# EAGLE board Scale Car Board PCB 20260625 (EAGLE 9.7.0)
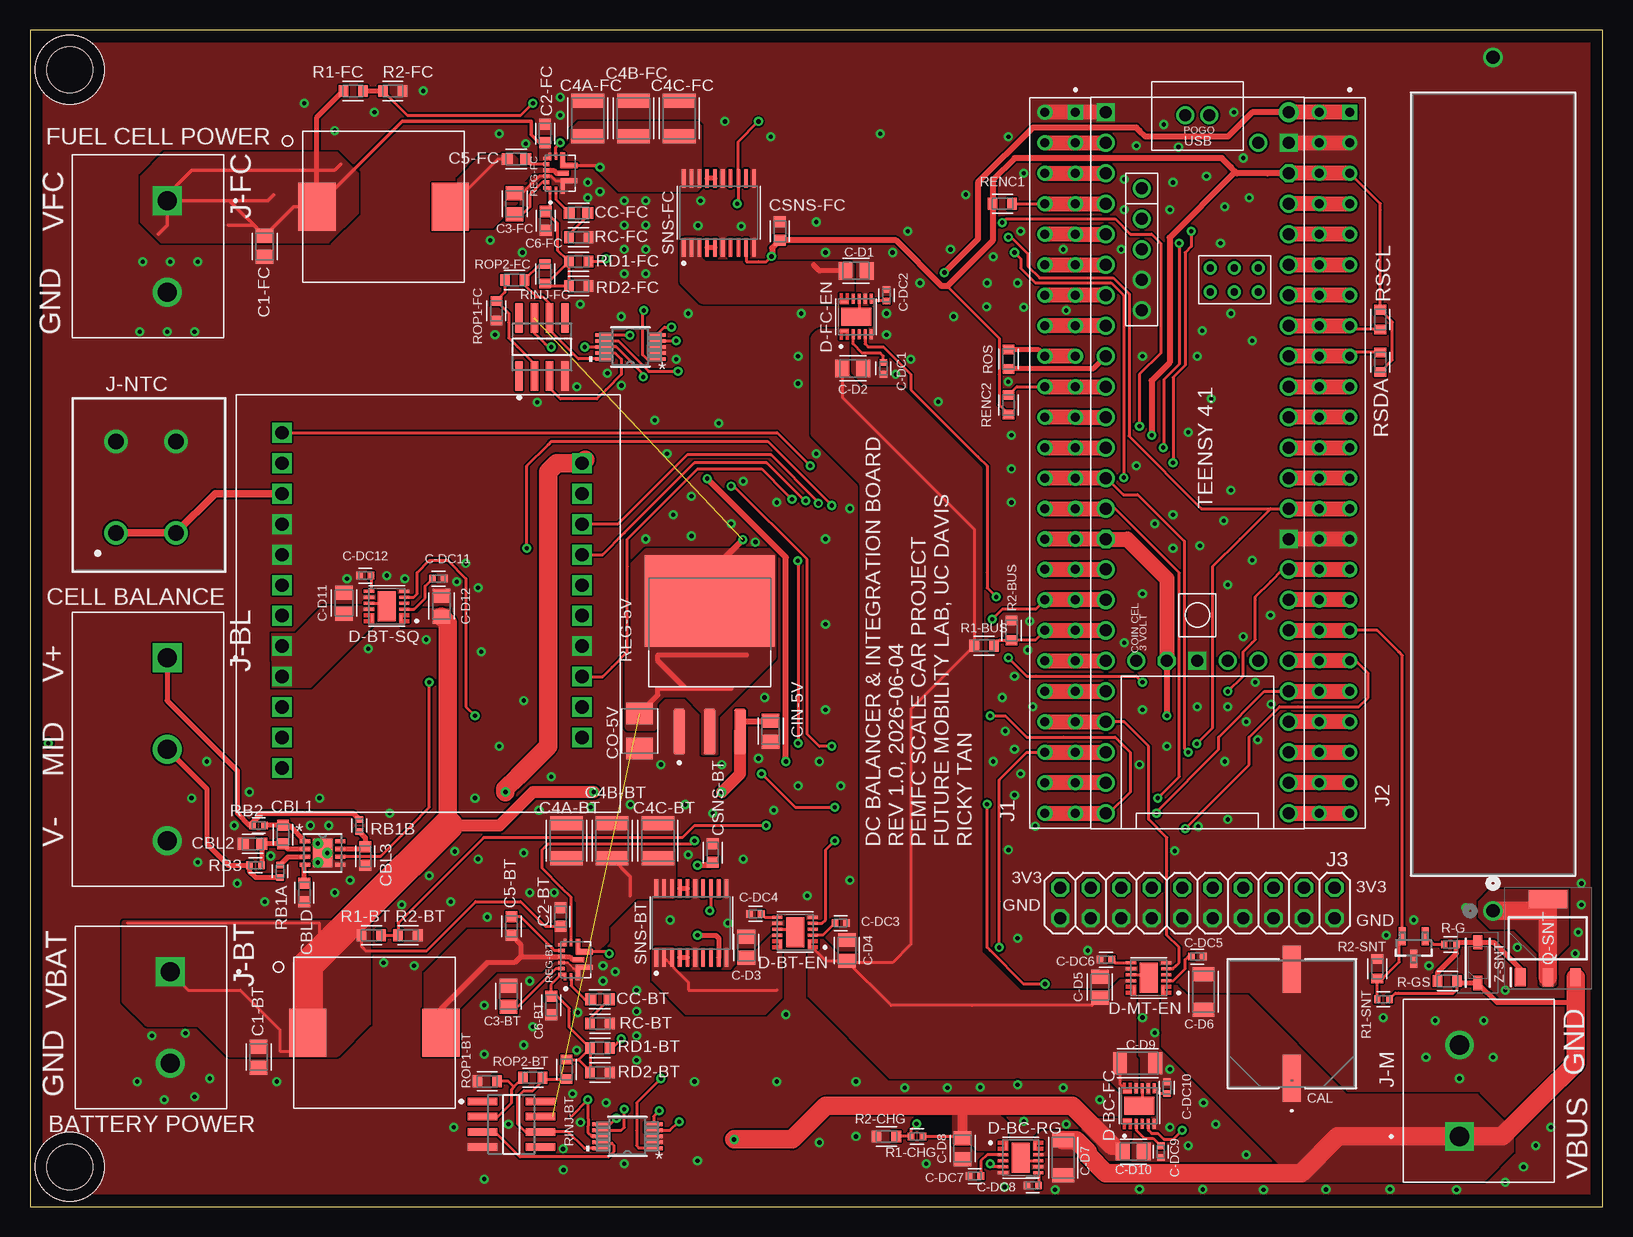
[diagram p0: board, top side]
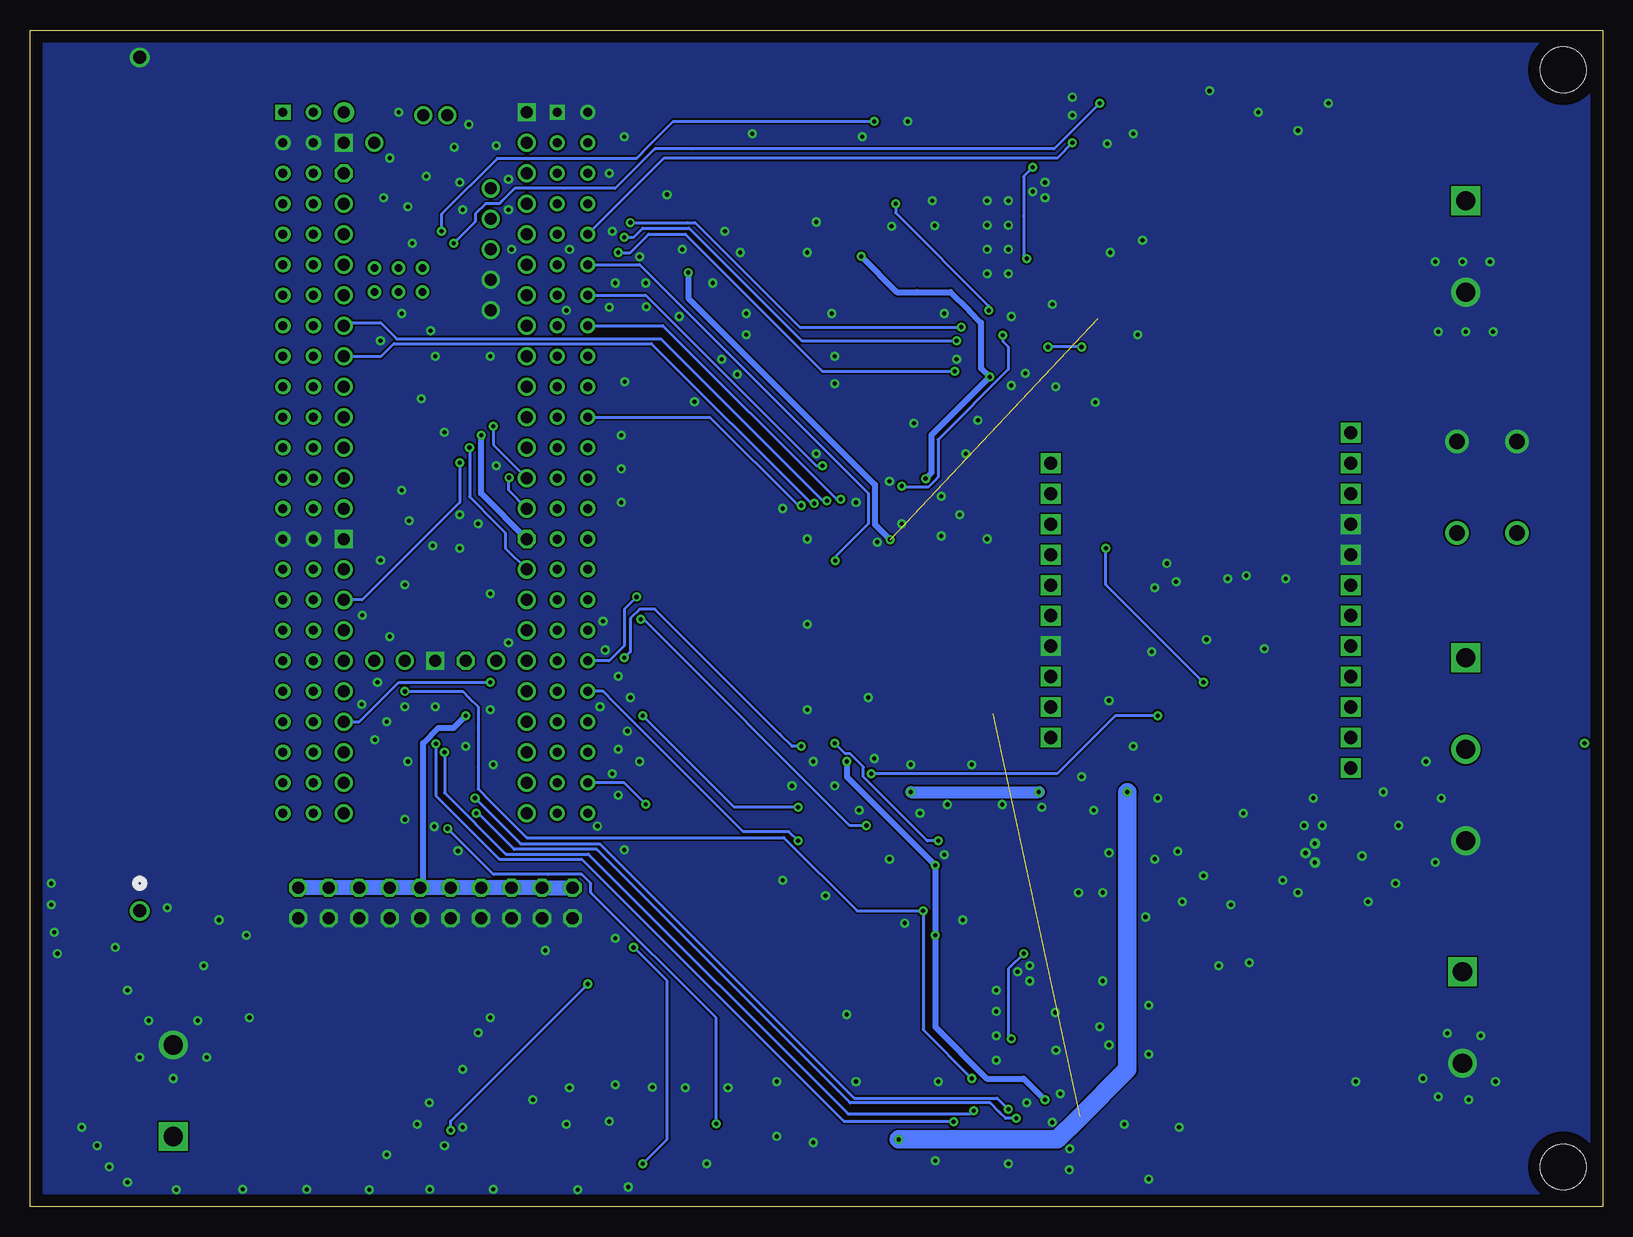
[diagram p1: board, bottom side, seen from below]

Size 131.06 x 98.04 mm. Coordinates in mm from the lower left corner, seen from the top.
Outline: 0,0 131.06,0 131.06,98.04 0,98.04 0,0
Copper layers (1*16): Top 0.035mm / dielectric 1.5mm / Bottom 0.035mm
Design rules "Fusion Electronics Design Rules": minimum track width 6mil, minimum drill 0.35mm, track to track 6mil, track to pad 6mil, pad to pad 6mil, via to via 6mil, smd to smd 6mil, copper to edge 40mil, drill to drill 6mil, minimum pad ring 10mil, minimum via ring 8mil, stop-mask expansion 4mil, vias tented up to drill 9999mil, thermal gap 10mil
Holes 3.8 mm at 3.3,94.74 3.3,3.3

## Footprints (pad centres in the part's own frame; a part is rotated, then mirrored left to right if it is on the bottom)
DRB8_1P6X2P4 = smd 0.85 x 0.35: 1 -1.475,0.975; 2 -1.475,0.325; 3 -1.475,-0.325; 4 -1.475,-0.975; 5 1.475,-0.975; 6 1.475,-0.325; 7 1.475,0.325; 8 1.475,0.975 | smd 1.6 x 2.4: 9 0,0 | drill 0.35 pad 0.508: V -0.394,-0.787; V_2 -0.394,0.787; V_4 0.394,0
CAPC2012X110 = smd 1.165 x 1.465: 1 -0.875,0; 2 0.875,0
CAPC1608X85 = smd 0.921 x 0.97: 1 -0.775,0; 2 0.775,0
CAPC3225X135 = smd 1.165 x 2.715: 1 -1.475,0; 2 1.475,0
CAPC3216X135 = smd 1.165 x 1.815: 1 -1.475,0; 2 1.475,0
CAPC1005X60 = smd 0.56 x 0.629: 1 -0.485,0; 2 0.485,0
CAP_FN_G_PAN = smd 3.912 x 1.499: 1 -4.547,0; 2 4.547,0
AG105 = drill 1.1 square: CSEL 1.5,-7.08; LDIS 26.5,-7.08; MPPTD 26.5,-29.94; MPPTSEL 26.5,-27.4; NC1 1.5,-14.7; NC2 1.5,-17.24; NC3 1.5,-24.86; SCL 1.5,-19.78; SDA 1.5,-22.32; STAT 1.5,-9.62; THERM 26.5,-24.86; VBAT+1 26.5,-12.16; VBAT+2 26.5,-9.62; VBAT-1 26.5,-22.32; VBAT-2 26.5,-19.78; VIN+ 1.5,-27.4; VIN- 1.5,-12.16; VLOAD+1 26.5,-4.54; VLOAD+2 26.5,-2; VLOAD-1 26.5,-17.24; VLOAD-2 26.5,-14.7; VSEL 1.5,-4.54
CAPM3528X210 = smd 1.796 x 2.204: 1 -1.46,0; 2 1.46,0
IC_RT1987N-A = smd 0.2 x 0.7: 1_2 -1.2,1; 11_12 1.2,1 | smd 0.85 x 0.25: 3 -1.475,0.25; 4 -1.475,-0.25; 5 -1.475,-0.75; 6 -1.475,-1.25; 7 1.475,-1.25; 8 1.475,-0.75; 9 1.475,-0.25; 10 1.475,0.25 | smd 1.5 x 2.5: 13 0,0
AMPHENOL_87606-324LF = drill 0.75 pad 1.258 square: 01 29.21,-1.27 | drill 0.75 pad 1.258: 02 29.21,1.27; 03 26.67,-1.27; 04 26.67,1.27; 05 24.13,-1.27; 06 24.13,1.27; 07 21.59,-1.27; 08 21.59,1.27; 09 19.05,-1.27; 10 19.05,1.27; 11 16.51,-1.27; 12 16.51,1.27; 13 13.97,-1.27; 14 13.97,1.27; 15 11.43,-1.27; 16 11.43,1.27; 17 8.89,-1.27; 18 8.89,1.27; 19 6.35,-1.27; 20 6.35,1.27; 21 3.81,-1.27; 22 3.81,1.27; 23 1.27,-1.27; 24 1.27,1.27; 25 -1.27,-1.27; 26 -1.27,1.27; 27 -3.81,-1.27; 28 -3.81,1.27; 29 -6.35,-1.27; 30 -6.35,1.27; 31 -8.89,-1.27; 32 -8.89,1.27; 33 -11.43,-1.27; 34 -11.43,1.27; 35 -13.97,-1.27; 36 -13.97,1.27; 37 -16.51,-1.27; 38 -16.51,1.27; 39 -19.05,-1.27; 40 -19.05,1.27; 41 -21.59,-1.27; 42 -21.59,1.27; 43 -24.13,-1.27; 44 -24.13,1.27; 45 -26.67,-1.27; 46 -26.67,1.27; 47 -29.21,-1.27; 48 -29.21,1.27
2X10 = drill 1.016 octagon: 1 -11.43,-1.27; 2 -11.43,1.27; 3 -8.89,-1.27; 4 -8.89,1.27; 5 -6.35,-1.27; 6 -6.35,1.27; 7 -3.81,-1.27; 8 -3.81,1.27; 9 -1.27,-1.27; 10 -1.27,1.27; 11 1.27,-1.27; 12 1.27,1.27; 13 3.81,-1.27; 14 3.81,1.27; 15 6.35,-1.27; 16 6.35,1.27; 17 8.89,-1.27; 18 8.89,1.27; 19 11.43,-1.27; 20 11.43,1.27
CUI_TB005_-762-03BE = drill 1.6 square: 1 0,0 | drill 1.6: 2 7.62,0; 3 15.24,0
CUI_TB005-762-02BE = drill 1.6 square: 1 0,0 | drill 1.6: 2 7.62,0
691411410002 = drill 1.3: 1 -3.81,2.5; 2 3.81,2.5; A1 -3.81,-2.5; A2 3.81,-2.5
HCM1A1305V3-2R2-R = smd 3.1 x 4: P$1 -5.55,0; P$2 5.55,0
RM_10_ADI = smd 1.511 x 0.33: 1 -2.175,1; 2 -2.175,0.5; 3 -2.175,0; 4 -2.175,-0.5; 5 -2.175,-1; 6 2.175,-1; 7 2.175,-0.5; 8 2.175,0; 9 2.175,0.5; 10 2.175,1
D0008A-IPC_A = smd 2.469 x 0.622: 1 -2.414,1.905; 2 -2.414,0.635; 3 -2.414,-0.635; 4 -2.414,-1.905; 5 2.414,-1.905; 6 2.414,-0.635; 7 2.414,0.635; 8 2.414,1.905
SOT230P700X170-4N = smd 1.5 x 0.9: 1 -3.25,2.3; 2 -3.25,0; 3 -3.25,-2.3 | smd 1.5 x 3.2: 4 3.25,0
RESC1608X60 = smd 0.799 x 0.974: 1 -0.815,0; 2 0.815,0
RESC1005X40 = smd 0.535 x 0.644: 1 -0.507,0; 2 0.507,0
RES_SQP20A_YAG = drill 1.092 pad 1.6: 1 0,0; 2 71.12,0
TO254P1524X483-4N = smd 3.79 x 0.99: 1 -6.4,2.54; 2 -6.4,0; 3 -6.4,-2.54 | smd 7.62 x 10.84: 4 4.48,0
CONV_TPS61288LRQQR = smd 0.235 x 0.71: 1 -1.238,1.1; 7 1.238,1.1 | smd 0.55 x 0.25: 2 -1.425,0.375; 6 1.425,0.375 | smd 1.26 x 0.4: 3 -1.072,-0.198; 5 1.075,-0.2 | smd 0.4 x 1: 4 0,-0.25 | smd 0.25 x 0.55: 8 0.75,1.175; 9 0.25,1.175; 10 -0.25,1.175; 11 -0.75,1.175 | smd 0.4 x 1.26: 12 -0.642,-0.828; 13 0.648,-0.828 | smd 0.55 x 0.26: 14 -1.427,0.875; 15 1.427,0.875
SOP65P640X120-20N = smd 1.57 x 0.41: 1 -2.87,2.925; 2 -2.87,2.275; 3 -2.87,1.625; 4 -2.87,0.975; 5 -2.87,0.325; 6 -2.87,-0.325; 7 -2.87,-0.975; 8 -2.87,-1.625; 9 -2.87,-2.275; 10 -2.87,-2.925; 11 2.87,-2.925; 12 2.87,-2.275; 13 2.87,-1.625; 14 2.87,-0.975; 15 2.87,-0.325; 16 2.87,0.325; 17 2.87,0.975; 18 2.87,1.625; 19 2.87,2.275; 20 2.87,2.925
TEENSY41 = drill 1: 0-RX1/CS1/CRX2 -27.94,-7.62; 1-TX1/MISO1/CTX2 -25.4,-7.62; 2-OUT2 -22.86,-7.62; 3-LRCLK2 -20.32,-7.62; 4-BCLK2 -17.78,-7.62; 5-IN2 -15.24,-7.62; 6-OUT1D -12.7,-7.62; 7-RX2/OUT1A -10.16,-7.62; 8-TX2/IN1 -7.62,-7.62; 9-OUT1C -5.08,-7.62; 10-CS\MQSR -2.54,-7.62; 11-MOSI/CTX1 0,-7.62; 12-MISO/MQSL 2.54,-7.62; 13-SCK/LED 2.54,7.62; 14-A0/TX3/SPDIF_OUT 0,7.62; 15-A1/RX3/SPDIF_IN -2.54,7.62; 16-A2/RX4/SCL1 -5.08,7.62; 17-A3/TX4/SDA1 -7.62,7.62; 18-A4/SDA0 -10.16,7.62; 19-A5/SCL0 -12.7,7.62; 20-A6/TX5/LRCLK1 -15.24,7.62; 21-A7/RX5/BCLK1 -17.78,7.62; 22-A8/CTX1 -20.32,7.62; 23-A9/CRX1/MCLK1 -22.86,7.62; 24-A10/TX6/SCL2 7.62,-7.62; 25-A11/RX6/SDA2 10.16,-7.62; 26-A12/MOSI1 12.7,-7.62; 27-A13/SCK1 15.24,-7.62; 28-RX7 17.78,-7.62; 29-TX7 20.32,-7.62; 30-CRX3 22.86,-7.62; 31-CTX3 25.4,-7.62; 32-OUT1B 27.94,-7.62; 33-MCLK2 27.94,7.62; 34-RX8 25.4,7.62; 35-TX8 22.86,7.62; 36-PWM 20.32,7.62; 37-PWM 17.78,7.62; 38-A14/CS/IN1 15.24,7.62; 39-A15/CS/OUT1A 12.7,7.62; 40-A16/CS1 10.16,7.62; 41-A17/MISO1 7.62,7.62; +5V -24.13,-4.62; D+ -30.25,-1; D- -30.25,1; DM -21.59,-4.62; DP -19.05,-4.62; GND4 -16.51,-4.62; GND5 -13.97,-4.62; ON/OFF 15.24,5.08; PROGRAM 15.24,2.54; VBAT 15.24,-5.08; VUSB -27.94,5.08 | drill 1 octagon: 3V3-1 5.08,-7.62; 3V3-2 15.24,-2.54; 3V3-3 -25.4,7.62 | drill 0.6: G -15.51,3.08; LED -17.51,3.08; R+ -17.51,5.08; R- -15.51,5.08; T+ -15.51,1.08; T- -17.51,1.08 | drill 1 square: GND1 -30.48,-7.62; GND2 15.24,0; GND3 5.08,7.62; GND6 -27.94,7.62 | drill 1 pad 1.676: VIN -30.48,7.62
DBZ0003A_N = smd 1.5 x 0.6: 1 -0.95,0.95; 2 -0.95,-0.95; 3 0.95,0
SOD3716X145N = smd 1.2 x 0.75: 1 -1.7,0; 2 1.7,0

## Placement (x,y rotation side)
BAL  BQ29200DRBTDRB8_1P6X2P4  [DRB8_1P6X2P4]  24.38,29.46 0 top
C1-BT  10uF  [CAPC2012X110]  19.05,12.45 270 top
C1-FC  10uF  [CAPC2012X110]  19.56,80.01 270 top
C2-BT  100nF  [CAPC1608X85]  44.2,24.13 90 top
C2-FC  100nF  [CAPC1608X85]  42.93,89.41 90 top
C3-BT  2.2uF  [CAPC2012X110]  39.88,17.53 90 top
C3-FC  2.2uF  [CAPC2012X110]  40.39,83.57 90 top
C4A-BT  22uF  [CAPC3225X135]  44.7,30.48 90 top
C4A-FC  22uF  [CAPC3225X135]  46.48,90.68 90 top
C4B-BT  22uF  [CAPC3225X135]  48.51,30.48 90 top
C4B-FC  22uF  [CAPC3225X135]  50.29,90.68 90 top
C4C-BT  22uF  [CAPC3225X135]  52.32,30.48 90 top
C4C-FC  22uF  [CAPC3225X135]  54.1,90.68 90 top
C5-BT  100nF  [CAPC1608X85]  40.13,23.37 90 top
C5-FC  100nF  [CAPC1608X85]  40.54,87.3 0 top
C6-BT  27pF  [CAPC1608X85]  43.43,16.76 90 top
C6-FC  27pF  [CAPC1608X85]  42.98,82.14 90 top
C-D1  10uF  [CAPC2012X110]  68.83,77.98 0 top
C-D2  10uF  [CAPC2012X110]  68.58,69.85 0 top
C-D3  10uF  [CAPC2012X110]  59.69,21.59 90 top
C-D4  10uF  [CAPC2012X110]  68.07,21.34 90 top
C-D5  10uF  [CAPC2012X110]  89.15,18.29 90 top
C-D6  10uF  [CAPC3216X135]  97.79,17.89 90 top
C-D7  10uF  [CAPC3216X135]  86.11,4.06 270 top
C-D8  10uF  [CAPC2012X110]  77.72,4.83 270 top
C-D9  10uF  [CAPC3216X135]  92.31,11.94 0 top
C-D10  10uF  [CAPC2012X110]  91.95,4.57 0 top
C-D11  10uF  [CAPC2012X110]  26.16,50.29 90 top
C-D12  10uF  [CAPC2012X110]  34.29,50.04 90 top
C-DC1  1nF  [CAPC1005X60]  71.12,69.85 90 top
C-DC2  5.6nF  [CAPC1005X60]  71.37,75.95 270 top
C-DC3  1nF  [CAPC1005X60]  67.56,23.62 180 top
C-DC4  5.6nF  [CAPC1005X60]  60.45,24.38 0 top
C-DC5  1nF  [CAPC1005X60]  97.28,20.83 180 top
C-DC6  5.6nF  [CAPC1005X60]  89.66,20.57 0 top
C-DC7  1nF  [CAPC1005X60]  78.74,2.54 0 top
C-DC8  5.6nF  [CAPC1005X60]  83.57,1.76 0 top
C-DC9  1nF  [CAPC1005X60]  94.23,4.57 90 top
C-DC10  5.6nF  [CAPC1005X60]  94.74,9.91 270 top
C-DC11  1nF  [CAPC1005X60]  34.04,52.32 180 top
C-DC12  5.6nF  [CAPC1005X60]  27.94,52.58 0 top
CAL  470uF EEE-FN1V471UPCAP_FN_G_PAN  [CAP_FN_G_PAN]  105.16,15.24 90 top
CBL1  100nF  [CAPC1608X85]  21.08,30.99 90 top
CBL2  100nF  [CAPC1608X85]  18.54,30.23 180 top
CBL3  100nF  [CAPC1608X85]  27.94,29.21 270 top
CBLD  330nF  [CAPC1608X85]  22.86,26.16 270 top
CC-BT  2nF  [CAPC1608X85]  47.5,17.27 180 top
CC-FC  2nF  [CAPC1608X85]  45.72,82.8 180 top
CHG  AG105  [AG105]  47.5,34.54 180 top
CIN-5V  10uF  [CAPC2012X110]  61.72,39.62 270 top
CO-5V  10uF TANT  [CAPM3528X210]  50.8,39.62 270 top
CSNS-BT  100nF  [CAPC1608X85]  56.9,29.46 270 top
CSNS-FC  100nF  [CAPC1608X85]  62.48,81.28 270 top
D-BC-FC  RT1987N-A  [IC_RT1987N-A]  92.46,8.38 90 top
D-BC-RG  RT1987N-A  [IC_RT1987N-A]  82.55,4.06 0 top
D-BT-EN  RT1987N-A  [IC_RT1987N-A]  63.75,22.86 180 top
D-BT-SQ  RT1987N-A  [IC_RT1987N-A]  29.72,50.04 180 top
D-FC-EN  RT1987N-A  [IC_RT1987N-A]  68.83,74.17 90 top
D-MT-EN  RT1987N-A  [IC_RT1987N-A]  93.22,19.05 180 top
J1  87606-324LF  [AMPHENOL_87606-324LF]  85.85,61.98 90 top
J2  87606-324LF  [AMPHENOL_87606-324LF]  108.71,61.98 90 top
J3  PINHD-2X10  [2X10]  97.28,25.29 0 top
J-BL  TB005_762_03BE  [CUI_TB005_-762-03BE]  11.43,45.72 270 top
J-BT  TB005-762-02BE  [CUI_TB005-762-02BE]  11.68,19.56 270 top
J-FC  TB005-762-02BE  [CUI_TB005-762-02BE]  11.43,83.82 270 top
J-M  TB005-762-02BE  [CUI_TB005-762-02BE]  119.13,5.84 90 top
J-NTC  691411410002  [691411410002]  9.65,59.94 90 top
L-BT  2.2uH  [HCM1A1305V3-2R2-R]  28.7,14.48 0 top
L-FC  2.2uH  [HCM1A1305V3-2R2-R]  29.46,83.31 0 top
MDAC-BT  AD5443YRMZ-REEL7RM_10_ADI  [RM_10_ADI]  49.78,5.84 180 top
MDAC-FC  AD5443YRMZ-REEL7RM_10_ADI  [RM_10_ADI]  50.04,71.63 180 top
OP-BT  OPA197IDD0008A-IPC_A  [D0008A-IPC_A]  40.13,6.86 0 top
OP-FC  OPA197IDD0008A-IPC_A  [D0008A-IPC_A]  42.67,71.63 90 top
Q-SNT  BSP170PH6327XTSA1  [SOT230P700X170-4N]  126.49,22.35 90 top
R1-BT  16.2kOhm  [RESC1608X60]  28.45,22.61 180 top
R1-BUS  46.4kOhm  [RESC1608X60]  79.5,46.74 180 top
R1-CHG  78.7kOhm  [RESC1005X40]  73.91,5.84 0 top
R1-FC  27.4kOhm  [RESC1608X60]  26.92,92.96 180 top
R1-SNT  78.7kOhm  [RESC1005X40]  112.78,17.27 0 top
R2-BT  10kOhm  [RESC1608X60]  31.5,22.61 180 top
R2-BUS  10kOhm  [RESC1608X60]  81.79,48.01 270 top
R2-CHG  10kOhm  [RESC1608X60]  71.37,5.84 0 top
R2-FC  10kOhm  [RESC1608X60]  30.23,92.96 180 top
R2-SNT  10kOhm  [RESC1608X60]  112.27,19.81 270 top
R-G  220 Ohm  [RESC1005X40]  118.36,21.84 180 top
R-GS  3.3kOhm  [RESC1608X60]  118.11,18.8 0 top
R-SHUNT  SQP20AJB-47RRES_SQP20A_YAG  [RES_SQP20A_YAG]  121.92,24.64 90 top
RB1A  100Ohm  [RESC1005X40]  20.83,27.94 90 top
RB1B  100Ohm  [RESC1005X40]  27.43,31.75 270 top
RB2  160Ohm  [RESC1005X40]  19.05,31.75 180 top
RB3  260Ohm  [RESC1005X40]  18.8,28.45 0 top
RC-BT  27.4kOhm  [RESC1608X60]  47.5,15.24 180 top
RC-FC  61.2kOhm  [RESC1608X60]  45.72,80.77 180 top
RD1-BT  237kOhm  [RESC1608X60]  47.5,13.21 0 top
RD1-FC  237kOhm  [RESC1608X60]  45.72,78.74 0 top
RD2-BT  10kOhm  [RESC1608X60]  47.5,11.18 180 top
RD2-FC  10kOhm  [RESC1608X60]  45.72,76.71 180 top
REG-5V  LM1084ISX-5.0/NOPB  [TO254P1524X483-4N]  56.64,45.97 90 top
REG-BT  TPS61288LRQQR  [CONV_TPS61288LRQQR]  45.47,20.57 90 top
REG-FC  TPS61288LRQQR  [CONV_TPS61288LRQQR]  44.2,86.11 90 top
RENC1  4.7kOhm  [RESC1608X60]  81.03,83.57 0 top
RENC2  4.7kOhm  [RESC1608X60]  81.53,66.8 90 top
RINJ-BT  53.6kOhm  [RESC1608X60]  44.7,11.43 90 top
RINJ-FC  53.6kOhm  [RESC1608X60]  42.93,77.72 270 top
ROP1-BT  10kOhm  [RESC1608X60]  38.1,10.44 180 top
ROP1-FC  10kOhm  [RESC1608X60]  38.86,74.65 270 top
ROP2-BT  40.2kOhm  [RESC1608X60]  41.91,10.73 0 top
ROP2-FC  40.2kOhm  [RESC1608X60]  40.39,77.22 0 top
ROS  100Ohm  [RESC1608X60]  81.53,70.61 270 top
RSCL  10kOhm  [RESC1608X60]  112.52,73.91 90 top
RSDA  10kOhm  [RESC1608X60]  112.52,70.36 270 top
SNS-BT  INA253A1IPWR  [SOP65P640X120-20N]  55.12,23.62 90 top
SNS-FC  INA253A1IPWR  [SOP65P640X120-20N]  57.4,82.8 90 top
U$1  TEENSY41  [TEENSY41]  97.28,60.71 270 top
U-SNT  TL431BIDBZRDBZ0003A_N  [DBZ0003A_N]  115.32,21.59 270 top
Z-SNT  BZT52C12-13-F  [SOD3716X145N]  120.65,20.32 90 top

## Library data of the parts
BAL = BQ29200DRBT; COPYRIGHT: Copyright (C) 2026 Ultra Librarian. All rights reserved.; DATASHEET: https://www.ti.com/lit/gpn/bq29200; DESCRIPTION: Voltage Protection with Automatic Cell Balance For 2-Cell Li-Ion Batteries, OVP=4.35V 8-SON -40 to 85; MANUFACTURER_NAME: Texas Instruments; MANUFACTURER_PART_NUMBER: BQ29200DRBT
C1-BT C1-FC C2-BT C2-FC C3-BT C3-FC C4A-BT C4A-FC C4B-BT C4B-FC C4C-BT C4C-FC C5-BT C5-FC C6-BT C6-FC C-D1-C-D12 C-DC1-C-DC12 CBL1-CBL3 CBLD CC-BT CC-FC CIN-5V CO-5V CSNS-BT CSNS-FC = Tutorial - Fusion 360; CATEGORY: Capacitor
CAL = EEE_FN1V471UP; COPYRIGHT: Copyright (C) 2026 Ultra Librarian. All rights reserved.; MANUFACTURER_NAME: Panasonic; MANUFACTURER_PART_NUMBER: EEE-FN1V471UP
CHG = Silvertel Ag105
D-BC-FC D-BC-RG D-BT-EN D-BT-SQ D-FC-EN D-MT-EN = RT1987N-A; AVAILABILITY: In Stock; CHECK_PRICES: https://www.snapeda.com/parts/RT1987N-A/Richtek/view-part/?ref=eda; DESCRIPTION: OR Controller N+1 ORing Controller N-Channel 1:1 12-VDFN Type V (3x3); MF: Richtek USA Inc.; MP: RT1987N-A; PACKAGE: None; PRICE: None; SNAPEDA_LINK: https://www.snapeda.com/parts/RT1987N-A/Richtek/view-part/?ref=snap
J1 J2 = 87606-324LF; MANUFACTURER: Amphenol ICC (FCI); PARTREV: S; STANDARD: Manufacturer Recommendations
J3 = Connector; CATEGORY: Headers; DESCRIPTION: Header, Straight, 2x10 Position; MANUFACTURER: Generic; MPN: Generic; OPERATING_TEMPERATURE: Generic; PART_STATUS: Active; PITCH: 0.100" (2.54mm); ROHS_COMPLIANCE: Generic; SERIES: Generic; SUB-CATEGORY: Headers, Male Pins; TYPE: Board to Board or Cable, Unshrouded, Through Hole, Straight
J-BL = TB005 -762-03BE
J-BT J-FC J-M = TB005-762-02BE; MANUFACTURER: CUI; STANDARD: Manufacturer Recommendations
J-NTC = Wurth 691411410002
L-BT L-FC = HCM1A1305V3-2R2-R
MDAC-BT MDAC-FC = AD5443YRMZ_REEL7; COPYRIGHT: Copyright (C) 2026 Ultra Librarian. All rights reserved.; DATASHEET: https://www.analog.com/media/en/technical-documentation/data-sheets/AD5426_5432_5443.pdf; DESCRIPTION: 12-Bit High Bandwidth Multiplying DAC's with Serial Interface; MANUFACTURER_NAME: Analog Devices Inc; MANUFACTURER_PART_NUMBER: AD5443YRMZ-REEL7
OP-BT OP-FC = OPA197; COPYRIGHT: Copyright (C) 2026 Ultra Librarian. All rights reserved.; DATASHEET: https://www.ti.com/lit/gpn/opa197; DESCRIPTION: Single, 36-V, precision, rail-to-rail input output, low offset voltage op amp 8-SOIC -40 to 125; MANUFACTURER_NAME: Texas Instruments; MANUFACTURER_PART_NUMBER: OPA197ID; REFDES: RefDes; TYPE: TYPE
Q-SNT = BSP170PH6327XTSA1; DESCRIPTION: MOSFET P-Ch -60V -1.9A SOT-223-3; HEIGHT: 1.7mm; MANUFACTURER_NAME: Infineon; MANUFACTURER_PART_NUMBER: BSP170PH6327XTSA1; MOUSER_PART_NUMBER: 726-BSP170PH6327XTSA; MOUSER_PRICE-STOCK: https://www.mouser.co.uk/ProductDetail/Infineon-Technologies/BSP170PH6327XTSA1?qs=LqwxS8kK3AuKjNiJohPfXg%3D%3D
R1-BT R1-BUS R1-CHG R1-FC R1-SNT R2-BT R2-BUS R2-CHG R2-FC R2-SNT R-G R-GS RB1A RB1B RB2 RB3 RC-BT RC-FC RD1-BT RD1-FC RD2-BT RD2-FC RENC1 RENC2 RINJ-BT RINJ-FC ROP1-BT ROP1-FC ROP2-BT ROP2-FC ROS RSCL RSDA = Resistor; CATEGORY: Resistor; SUB-CATEGORY: Fixed
R-SHUNT = SQP20AJB_47R; COPYRIGHT: Copyright (C) 2026 Ultra Librarian. All rights reserved.; MANUFACTURER_NAME: Yageo; MANUFACTURER_PART_NUMBER: SQP20AJB-47R
REG-5V = LM1084ISX-5
REG-BT REG-FC = TPS61288LRQQR; MANUFACTURER: Texas Instruments; MAXIMUM_PACKAGE_HEIGHT: 1 mm; PARTREV: C; SNAPEDA_PACKAGE_ID: 121210; STANDARD: Manufacturer Recommendations
SNS-BT SNS-FC = INA253A1IPWR
U$1 = TEENSY
U-SNT = TL431BIDBZR; COPYRIGHT: Copyright (C) 2026 Ultra Librarian. All rights reserved.; DATASHEET: https://www.ti.com/lit/gpn/tl431; DESCRIPTION: Adjustable precision shunt regulator 3-SOT-23 -40 to 85; MANUFACTURER_NAME: Texas Instruments; MANUFACTURER_PART_NUMBER: TL431BIDBZR; REFDES: RefDes; TYPE: TYPE
Z-SNT = BZT52C12-13-F; DESCRIPTION: Diodes Inc BZT52C12-13-F Zener Diode, 12V 5% 500 mW SMT 2-Pin SOD-123; HEIGHT: 1.45mm; MANUFACTURER_NAME: Diodes Incorporated; MANUFACTURER_PART_NUMBER: BZT52C12-13-F; MOUSER_PART_NUMBER: 621-BZT52C12-13-F; MOUSER_PRICE-STOCK: https://www.mouser.co.uk/ProductDetail/Diodes-Incorporated/BZT52C12-13-F?qs=HTVp8UxD9pVKIHiLPWVR%2FQ%3D%3D

## Nets
3V3: CSNS-BT.2 CSNS-FC.2 J1.29 J1.30 J2.05 J2.06 J3.2 J3.4 J3.6 J3.8 J3.10 J3.12 J3.14 J3.16 J3.18 J3.20 MDAC-BT.8 MDAC-FC.8 RENC1.1 RENC2.1 RSCL.2 RSDA.2 SNS-BT.9 SNS-FC.9 U$1.3V3-1 U$1.3V3-2 U$1.3V3-3
5V: CO-5V.1 J2.01 J2.02 OP-BT.7 OP-FC.7 REG-5V.2 REG-5V.4 U$1.VIN
BAL-NOK: BAL.8
BT-CURR: J2.31 J2.32 MDAC-BT.1 SNS-BT.13 U$1.41-A17/MISO1
BT-V: J1.33 J1.34 R1-BT.1 R2-BT.2 U$1.25-A11/RX6/SDA2
BUS-V: J1.35 J1.36 R1-BUS.1 R2-BUS.2 U$1.26-A12/MOSI1
CB-DISABLE: BAL.6 J1.21 J1.22 U$1.9-OUT1C
CHG-V: J2.37 J2.38 R1-CHG.1 R2-CHG.2 U$1.38-A14/CS/IN1
CHRG-STAT: CHG.STAT J1.15 J1.16 U$1.6-OUT1D
CS-MDAC-BT: J2.39 J2.40 MDAC-BT.6 U$1.37-PWM
CS-MDAC-FC: J2.41 J2.42 MDAC-FC.6 U$1.36-PWM
D-BC-FC: D-BC-FC.5 J1.45 J1.46 U$1.31-CTX3
D-BC-RG: D-BC-RG.5 J1.43 J1.44 U$1.30-CRX3
D-BT-EN: D-BT-EN.5 J1.39 J1.40 U$1.28-RX7
D-BT-SQ: D-BT-SQ.5 J1.47 J1.48 U$1.32-OUT1B
D-FC-EN: D-FC-EN.5 J1.37 J1.38 U$1.27-A13/SCK1
D-MT-EN: D-MT-EN.5 J1.41 J1.42 U$1.29-TX7
EN-REG-BT: J1.11 J1.12 REG-BT.6 U$1.4-BCLK2
EN-REG-FC: J1.09 J1.10 REG-FC.6 U$1.3-LRCLK2
ENC-EN: J1.17 J1.18 ROS.1
ENC_A: J1.07 J1.08 RENC1.2 U$1.2-OUT2
ENC_B: J1.19 J1.20 RENC2.2 U$1.8-TX2/IN1
FC-CURR: J2.33 J2.34 MDAC-FC.1 SNS-FC.13 U$1.40-A16/CS1
FC-V: J1.31 J1.32 R1-FC.1 R2-FC.2 U$1.24-A10/TX6/SCL2
GND: BAL.5 BAL.9 BAL.V BAL.V_2 BAL.V_4 C1-BT.2 C1-FC.2 C2-BT.2 C2-FC.2 C3-BT.2 C3-FC.2 C4A-BT.2 C4A-FC.2 C4B-BT.2 C4B-FC.2 C4C-BT.2 C4C-FC.2 C6-BT.1 C6-FC.1 C-D1.2 C-D2.2 C-D3.2 C-D4.2 C-D5.2 C-D6.2 C-D7.2 C-D8.2 C-D9.2 C-D10.2 C-D11.2 C-D12.2 C-DC1.1 C-DC2.1 C-DC3.1 C-DC4.1 C-DC5.1 C-DC6.1 C-DC7.1 C-DC8.1 C-DC9.1 C-DC10.1 C-DC11.1 C-DC12.1 CAL.2 CBL2.2 CBL3.2 CBLD.2 CHG.VBAT-1 CHG.VBAT-2 CHG.VIN- CIN-5V.2 CO-5V.2 CSNS-BT.1 CSNS-FC.1 D-BC-FC.6 D-BC-FC.8 D-BC-RG.6 D-BC-RG.8 D-BT-EN.6 D-BT-EN.8 D-BT-SQ.6 D-BT-SQ.8 D-FC-EN.6 D-FC-EN.8 D-MT-EN.6 D-MT-EN.8 J1.01 J1.02 J2.03 J2.04 J2.29 J2.30 J3.1 J3.3 J3.5 J3.7 J3.9 J3.11 J3.13 J3.15 J3.17 J3.19 J-BL.3 J-BT.2 J-FC.2 J-M.2 J-NTC.2 J-NTC.A2 MDAC-BT.2 MDAC-BT.3 MDAC-FC.2 MDAC-FC.3 OP-BT.4 OP-FC.4 R2-BT.1 R2-BUS.1 R2-CHG.1 R2-FC.1 R2-SNT.1 R-SHUNT.2 RC-BT.1 RC-FC.1 RD2-BT.1 RD2-FC.1 REG-5V.1 REG-BT.3 REG-BT.10 REG-BT.12 REG-FC.3 REG-FC.10 REG-FC.12 ROP1-BT.2 ROP1-FC.2 SNS-BT.6 SNS-BT.10 SNS-BT.11 SNS-BT.15 SNS-FC.6 SNS-FC.10 SNS-FC.11 SNS-FC.15 U$1.GND1 U$1.GND2 U$1.GND3 U$1.GND4 U$1.GND5 U$1.GND6 U-SNT.3
MISO: J1.27 J1.28 MDAC-BT.7 MDAC-FC.7 U$1.12-MISO/MQSL
MOSI: J1.25 J1.26 MDAC-BT.5 MDAC-FC.5 U$1.11-MOSI/CTX1
MPPT-DISABLE: CHG.MPPTD J1.13 J1.14 U$1.5-IN2
N$1: SNS-FC.16 SNS-FC.17
N$2: CC-FC.1 RC-FC.2
N$3: C3-FC.1 REG-FC.11
N$4: C5-FC.2 REG-FC.8
N$5: SNS-FC.4 SNS-FC.5
N$6: C-DC1.2 D-FC-EN.3
N$7: MDAC-FC.9 OP-FC.3
N$8: OP-FC.2 ROP1-FC.1 ROP2-FC.1
N$9: C3-BT.1 REG-BT.11
N$10: C5-BT.2 REG-BT.8
N$11: CC-BT.1 RC-BT.2
N$12: SNS-BT.16 SNS-BT.17
N$13: SNS-BT.4 SNS-BT.5
N$14: C-DC3.2 D-BT-EN.3
N$15: MDAC-BT.9 OP-BT.3
N$16: OP-BT.2 ROP1-BT.1 ROP2-BT.1
N$17: D-FC-EN.9 D-FC-EN.13
N$18: C-DC2.2 D-FC-EN.7
N$19: D-BT-EN.9 D-BT-EN.13
N$20: C-DC4.2 D-BT-EN.7
N$21: ROS.2 U$1.7-RX2/OUT1A
N$22: C-DC5.2 D-MT-EN.3
N$23: C-DC7.2 D-BC-RG.3
N$24: D-MT-EN.9 D-MT-EN.13
N$25: C-DC6.2 D-MT-EN.7
N$26: D-BC-RG.9 D-BC-RG.13
N$27: C-DC8.2 D-BC-RG.7
N$28: C-DC9.2 D-BC-FC.3
N$29: D-BC-FC.9 D-BC-FC.13
N$30: C-DC10.2 D-BC-FC.7
N$31: C-DC11.2 D-BT-SQ.3
N$32: D-BT-SQ.9 D-BT-SQ.13
N$33: C-DC12.2 D-BT-SQ.7
N$34: CHG.THERM J-NTC.1 J-NTC.A1
N$35: BAL.4 CBLD.1
N$36: R-G.2 U-SNT.1
N$38: BAL.7 CBL3.1 RB1B.2
N$39: Q-SNT.2 Q-SNT.4 R-SHUNT.1
PIN0: J1.03 J1.04 U$1.0-RX1/CS1/CRX2
PIN1: J1.05 J1.06 U$1.1-TX1/MISO1/CTX2
PIN10: J1.23 J1.24 U$1.10-CS\MQSR
PIN14: J2.25 J2.26 U$1.14-A0/TX3/SPDIF_OUT
PIN15: J2.23 J2.24 U$1.15-A1/RX3/SPDIF_IN
PIN16: J2.21 J2.22 U$1.16-A2/RX4/SCL1
PIN17: J2.19 J2.20 U$1.17-A3/TX4/SDA1
PIN20: J2.13 J2.14 U$1.20-A6/TX5/LRCLK1
PIN21: J2.11 J2.12 U$1.21-A7/RX5/BCLK1
PIN22: J2.09 J2.10 U$1.22-A8/CTX1
PIN23: J2.07 J2.08 U$1.23-A9/CRX1/MCLK1
PIN33: J2.47 J2.48 U$1.33-MCLK2
PIN34: J2.45 J2.46 U$1.34-RX8
PIN35: J2.43 J2.44 U$1.35-TX8
RGN-V: J2.35 J2.36 R1-SNT.1 R2-SNT.2 U$1.39-A15/CS/OUT1A U-SNT.2
SCK: J2.27 J2.28 MDAC-BT.4 MDAC-FC.4 U$1.13-SCK/LED
SCL: CHG.SCL J2.15 J2.16 RSCL.1 U$1.19-A5/SCL0
SDA: CHG.SDA J2.17 J2.18 RSDA.1 U$1.18-A4/SDA0
V-MOT: C-D6.1 C-D7.1 CAL.1 D-BC-RG.10 D-BC-RG.11_12 D-MT-EN.1_2 J-M.1 Q-SNT.3 R1-SNT.2 R-GS.2 Z-SNT.1
VBAL+: J-BL.1 RB1B.1 RB2.2
VBT: C1-BT.1 C2-BT.1 C-D12.1 CIN-5V.1 D-BT-SQ.1_2 J-BT.1 L-BT.P$1 R1-BT.2 REG-5V.3 REG-BT.7 REG-BT.15
VBUS: C-D2.1 C-D4.1 C-D5.1 C-D9.1 D-BC-FC.10 D-BC-FC.11_12 D-BT-EN.1_2 D-FC-EN.1_2 D-MT-EN.10 D-MT-EN.11_12 R1-BUS.2
VBUS-BT: C-D3.1 D-BT-EN.10 D-BT-EN.11_12 SNS-BT.1 SNS-BT.2 SNS-BT.3
VBUS-FC: C-D1.1 D-FC-EN.10 D-FC-EN.11_12 SNS-FC.1 SNS-FC.2 SNS-FC.3
VC1: BAL.2 CBL1.1 CBL2.1 RB3.2
VC1_CB: BAL.3 RB1A.2
VC2: BAL.1 CBL1.2 RB2.1
VCHG: C-D11.1 CHG.VBAT+1 CHG.VBAT+2 D-BT-SQ.10 D-BT-SQ.11_12
VCHG-IN: C-D8.1 C-D10.1 CHG.VIN+ D-BC-FC.1_2 D-BC-RG.1_2 R1-CHG.2
VCOMP-BT: CC-BT.2 REG-BT.2
VCOMP-FC: CC-FC.2 REG-FC.2
VDROOP-BT: MDAC-BT.10 OP-BT.6 RINJ-BT.1 ROP2-BT.2
VDROOP-FC: MDAC-FC.10 OP-FC.6 RINJ-FC.1 ROP2-FC.2
VFB-BT: C6-BT.2 RD1-BT.1 RD2-BT.2 REG-BT.1 REG-BT.14 RINJ-BT.2
VFB-FC: C6-FC.2 RD1-FC.1 RD2-FC.2 REG-FC.1 REG-FC.14 RINJ-FC.2
VFC: C1-FC.1 C2-FC.1 J-FC.1 L-FC.P$1 R1-FC.2 REG-FC.7 REG-FC.15
VG: Q-SNT.1 R-G.1 R-GS.1 Z-SNT.2
VMID: J-BL.2 RB1A.1 RB3.1
VOUT-BT: C4A-BT.1 C4B-BT.1 C4C-BT.1 RD1-BT.2 REG-BT.5 REG-BT.13 SNS-BT.18 SNS-BT.19 SNS-BT.20
VOUT-FC: C4A-FC.1 C4B-FC.1 C4C-FC.1 RD1-FC.2 REG-FC.5 REG-FC.13 SNS-FC.18 SNS-FC.19 SNS-FC.20
VSW-BT: C5-BT.1 L-BT.P$2 REG-BT.4 REG-BT.9
VSW-FC: C5-FC.1 L-FC.P$2 REG-FC.4 REG-FC.9

## Tracks (layer width: path | path; a pad name or v marks a point on that pad's centre or on a via)
3V3  (via drill 0.35)
  Top 0.254: MDAC-BT.8 46.79,5.84 46.48,6.15 46.48,6.69 46.53,6.74 46.53,7.28 46.48,7.33 v46.48,8.89 45.09,7.49 | 57.4,20.76 SNS-BT.9 | 76.43,76.69 80.77,72.36 80.77,69.34 80.77,66.81 81.03,66.55 81.53,66.04 RENC2.1 | RSDA.2 113.54,70.56 113.54,73.66 113.54,73.71 RSCL.2 112.52,83.06 112.52,83.57 J2.05 | SNS-FC.9 59.69,78.74 60.71,78.74 61.36,78.74 v61.79,79.18 | 42.04,72.77 42.42,72.39 42.93,71.88 43.18,71.63 v43.43,71.63 | v51.1,69.13 51.1,69.37 48.84,71.63 MDAC-FC.8 v46.23,71.63
  Top 0.406: v55.63,22.61 57.15,22.61 57.4,22.35 57.4,20.76 57.41,20.75
  Top 0.508: U$1.3V3-3 103.12,86.11 100.58,86.11 | 100.58,86.11 100.08,86.61 99.31,87.38 90.68,87.38 83.57,87.38 83.31,87.38 82.04,87.38 80.21,85.55 RENC1.1 80.21,80.48 76.43,76.69 75.98,76.69 72.17,80.5 CSNS-FC.2 61.85,79.87 61.85,79.23 v61.79,79.18 | v62.99,37.08 62.99,54.1 v56.43,60.66 | v55.63,28.45 56.66,28.45 CSNS-BT.2 | U$1.3V3-2 v94.74,40.89 | v93.47,64.26 93.47,68.83 94.97,70.33 94.97,80.75 100.33,86.11 100.58,86.11
  Top 1.27: J1.30 J1.29 U$1.3V3-1 91.44,55.63 94.74,52.32 U$1.3V3-2 | J2.05 J2.06 U$1.3V3-3
  Bottom 0.254: v43.43,71.63 v46.23,71.63
  Bottom 0.508: v46.48,8.89 48.26,10.67 51.32,10.67 55.63,14.98 v55.63,22.61 v55.63,28.45 62.99,35.81 v62.99,37.08 | v94.74,40.89 95.76,39.88 97.03,39.88 98.3,38.61 98.3,36.07 98.3,26.82 J3.12 | U$1.3V3-1 93.47,59.44 v93.47,64.26 | v56.43,60.66 55.92,61.17 55.92,64.31 v51.1,69.13 51.82,69.85 51.82,71.37 51.82,73.66 52.83,74.68 54.36,76.2 57.15,76.2 58.82,76.2 v61.79,79.18
  Bottom 1.27: J3.2 J3.4 J3.6 J3.8 J3.10 J3.12 J3.14 J3.16 J3.18 J3.20
5V  (via drill 0.35)  (2 unrouted)
  Top 0.254: 43.56,7.49 OP-BT.7
  Top 0.406: CO-5V.1 52.32,42.61 52.32,43.18 54.61,43.18 | 54.61,43.18 58.42,43.18 | 54.61,43.18 52.32,45.47 52.32,45.97 59.69,45.97
  Top 0.508: 56.64,52.07 REG-5V.4 56.64,52.83 v59.39,55.58 | U$1.VIN 101.85,91.19 101.35,90.68 99.82,89.15 98.81,89.15 92.96,89.15 92.46,89.66 92.2,89.92 88.14,89.92 83.57,89.92 78.99,85.34 78.99,80.62 v76.2,77.83
  Top 1.27: J2.01 J2.02 U$1.VIN
  Bottom 0.508: v59.39,55.58 60.66,56.85 60.66,60.15 76.2,75.69 v76.2,77.83
  pour Top (no thermals): 56.1,41.29 56.13,41.2 56.13,37.85 57.15,37.85 57.15,40.94 57.19,41.04 61.98,45.83 61.98,54.25 61.62,54.61 51.41,54.61 49.78,52.98 49.78,39.98 49.89,39.88 51.96,39.88 52.07,39.98 52.07,41.96 52.11,42.05 52.69,42.63 52.78,42.67 54.66,42.67 54.75,42.63
BT-CURR  (via drill 0.35)
  Top 0.254: SNS-BT.13 56.74,24.74 v56.64,24.64 | MDAC-BT.1 51.9,4.9 50.73,4.9 50.55,5.08 50.55,6.35 50.55,8.64 v52.58,10.67 | v99.82,42.93 101.09,44.2 101.09,45.72 101.09,46.23 101.85,46.99 102.11,47.24 102.11,50.55 102.11,50.8 103.38,52.07 104.39,53.09 U$1.41-A17/MISO1
  Top 1.27: U$1.41-A17/MISO1 J2.32 J2.31
  Bottom 0.254: v99.82,42.93 95,42.93 94.49,42.42 93.73,41.66 93.73,39.88 93.73,36.58 93.73,34.8 92.69,33.77 89.66,30.73 68.24,30.73 62.14,24.64 v56.64,24.64 56.64,14.73 v52.58,10.67
BT-V  (via drill 0.35 pad 0.25)
  Top 0.254: R1-BT.1 R2-BT.2 30.68,23.62 37.79,30.73 54.36,30.73 55.37,31.75 v61.36,31.75 | J1.34 83.82,49.78 81.03,49.78 v80.18,48.94
  Top 1.27: U$1.25-A11/RX6/SDA2 J1.33 J1.34
  Bottom 0.254: v61.36,31.75 62.74,31.75 79.93,48.94 v80.18,48.94
BUS-V
  Top 0.254: J1.36 83.82,47.24 81.84,47.24 R2-BUS.2 80.77,47.19 R1-BUS.1
  Top 1.27: J1.36 J1.35 U$1.26-A12/MOSI1
CB-DISABLE  (via drill 0.35)
  Top 0.254: BAL.6 25.93,29.21 28.45,29.21 29.21,29.21 31.75,31.75 33.27,33.27 v33.27,43.69 | v41.4,54.86 41.4,61.72 43.18,63.5 43.43,63.75 61.47,63.75 v66.8,58.42
  Top 1.27: U$1.9-OUT1C J1.21 J1.22
  Bottom 0.254: v33.27,43.69 41.4,51.82 v41.4,54.86 | v66.8,58.42 67.06,58.42 74.42,65.79 J1.22
CHG-V  (via drill 0.35)
  Top 0.254: R2-CHG.2 R1-CHG.1 73.41,6.35 73.88,6.82 v73.88,6.89 | v96.27,31.5 101.6,36.83 101.6,39.12 104.14,41.66 105.66,41.66 110.74,41.66 111.51,42.42 111.51,44.45 111.25,44.7 110.49,45.47 J2.37
  Top 1.27: J2.37 J2.38 U$1.38-A14/CS/IN1
  Bottom 0.254: v73.88,6.89 73.88,15.71 84.33,26.16 84.33,26.92 85.09,27.69 87.88,27.69 92.46,27.69 v96.27,31.5
CHRG-STAT  (via drill 0.35)
  Top 0.254: CHG.STAT 47.72,44.16 48.51,44.96 49.78,46.23 49.78,53.34 49.78,55.63 54.36,60.2 55.63,61.47 60.96,61.47 62.99,59.44 v63.5,58.93
  Top 1.27: U$1.6-OUT1D J1.15 J1.16
  Bottom 0.254: v63.5,58.93 63.84,58.93 78.32,73.41 J1.16
CS-MDAC-BT  (via drill 0.35)
  Top 0.254: MDAC-BT.6 47.62,6.86 48.36,6.86 v48.87,7.37 | U$1.37-PWM 102.87,42.93 99.06,39.12 99.06,38.1 93.88,32.92 v93.88,32.77
  Top 1.27: U$1.37-PWM J2.40 J2.39
  Bottom 0.254: v48.87,7.37 48.87,7.35 49.77,7.35 50.29,7.87 51.05,8.64 62.72,8.64 83.86,29.77 90.73,29.77 93.73,32.77 v93.88,32.77
CS-MDAC-FC  (via drill 0.35)
  Top 0.254: v92.71,43.69 92.2,44.2 83.82,44.2 83.06,44.2 v81.53,45.72 | v66.8,38.35 65.79,38.35 64.77,39.37 64.77,53.93 58.67,60.04 v58.42,60.04 | MDAC-FC.6 49.55,72.63 49.57,72.6 v49.99,72.6
  Top 1.27: J2.41 J2.42 U$1.36-PWM
  Bottom 0.254: U$1.36-PWM 103.63,40.39 102.62,41.4 100.33,43.69 95,43.69 v92.71,43.69 | v81.53,45.72 81.03,46.23 81.03,49.02 80.26,49.78 78.99,49.78 68.58,39.37 67.56,38.35 v66.8,38.35 | v49.99,72.6 49.99,72.09 49.53,71.63 49.53,69.77 55.39,63.91 55.39,60.77 56.22,59.94 58.33,59.94 v58.42,60.04
D-BC-FC  (via drill 0.35)
  Top 0.254: D-BC-FC.5 93.21,6.36 93.22,6.35 93.47,6.1 93.73,6.1 93.98,6.1 94.46,5.62 94.49,5.62 95.28,5.62 v96.01,6.35 | v84.58,18.54 82.8,18.54 80.01,21.34 79.76,21.59 v79.76,33.53
  Top 1.27: U$1.31-CTX3 J1.45 J1.46
  Bottom 0.254: v96.01,6.35 96.01,7.11 95.5,7.62 v84.58,18.54 | v79.76,33.53 81.53,35.31 J1.46
D-BC-RG  (via drill 0.35)
  Top 0.254: D-BC-RG.5 81.06,3.3 80.01,3.3 v80.01,3.56 | v80.77,21.59 80.77,25.4 80.77,35.56 83.06,37.85 J1.44
  Top 1.27: J1.44 J1.43 U$1.30-CRX3
  Bottom 0.254: v80.01,3.56 77.98,5.59 77.98,18.8 v80.77,21.59
D-BT-EN  (via drill 0.35)
  Top 0.254: D-BT-EN.5 65.24,23.62 66.04,23.62 66.29,23.88 66.29,24.38 66.29,29.72 v67.06,30.48
  Top 1.27: J1.40 J1.39 U$1.28-RX7
  Bottom 0.254: v67.06,30.48 67.82,31.24 71.63,31.24 82.3,41.91 83.31,42.93 J1.40
D-BT-SQ  (via drill 0.35)
  Top 0.254: D-BT-SQ.5 31.99,50.79 32.26,51.05 32.26,52.32 32.26,52.83 33.27,53.85 34.8,53.85 36.32,52.32 36.32,41.66 v37.08,40.89 | v60.96,36.07 63.75,33.27 v67.06,33.27 | v80.01,40.89 81.28,40.89 81.79,40.39 83.06,39.12 86.11,39.12 90.42,39.12 91.19,38.35 91.69,37.85 91.69,34.54 89.92,32.77 U$1.32-OUT1B
  Top 1.27: J1.48 J1.47 U$1.32-OUT1B
  Bottom 0.254: v37.08,40.89 40.64,40.89 44.45,37.08 45.47,36.07 v60.96,36.07 | v67.06,33.27 72.39,33.27 v80.01,40.89
D-FC-EN  (via drill 0.35)
  Top 0.254: D-FC-EN.5 69.6,72.68 69.6,72.14 69.6,71.88 69.85,71.63 71.12,71.63 73.41,69.34 73.41,68.58 73.41,68.07 78.99,62.48 79.76,61.72 79.76,52.83 79.76,51.56 v80.52,50.8
  Top 1.27: U$1.27-A13/SCK1 J1.37 J1.38
  Bottom 0.254: v80.52,50.8 81.53,49.78 81.53,48.26 81.53,46.74 82.55,45.72 82.8,45.47 J1.38
D-MT-EN
  Top 0.254: D-MT-EN.5 95.24,19.8 95.5,20.07 95.76,20.32 95.76,20.57 95.76,21.59 94.74,22.61 94.74,27.94 94.74,30.73 93.22,32.26 93.22,37.08 93.22,38.35 91.69,39.88 91.19,40.39 U$1.29-TX7
  Top 1.27: U$1.29-TX7 J1.41 J1.42
EN-REG-BT  (via drill 0.35 pad 0.25)
  Top 0.254: REG-BT.6 45.09,25.77 44.32,26.54 42.67,28.19 42.67,29.72 43.18,30.23 54.36,30.23 55.12,30.23 v55.37,30.48 | v63.97,53.81 64.01,53.77 v64.01,38.61
  Top 1.27: J1.12 J1.11 U$1.4-BCLK2
  Bottom 0.254: J1.12 80.26,78.49 61.21,59.44 61.21,56.9 63.97,54.14 v63.97,53.81 | v64.01,38.61 63.14,37.74 62.72,37.74 61.62,36.64 61.62,35.8 56.3,30.48 v55.37,30.48
EN-REG-FC  (via drill 0.35)
  Top 0.254: REG-FC.6 43.82,88.27 v44.2,88.65
  Top 1.27: U$1.3-LRCLK2 J1.09 J1.10
  Bottom 0.254: v44.2,88.65 45.47,87.38 78.23,87.38 J1.10
ENC-EN
  Top 0.406: ROS.1 84.02,71.43 J1.18
  Top 1.27: J1.17 J1.18
ENC_A
  Top 0.254: RENC1.2 J1.08
  Top 1.27: J1.08 J1.07 U$1.2-OUT2
ENC_B
  Top 0.254: RENC2.2 82.24,68.33 J1.20
  Top 1.27: J1.20 J1.19 U$1.8-TX2/IN1
FC-CURR  (via drill 0.35)
  Top 0.254: v58.93,83.57 59.03,83.67 SNS-FC.13 59.03,88.75 v60.71,90.42 | MDAC-FC.1 51.4,70.63 51.05,70.97 51.05,74.57 v51.16,74.67 | v96.77,81.28 96.77,80.01 96.27,79.5 96.27,70.1 95.25,69.09 v95.25,61.98
  Top 1.27: J2.33 J2.34 U$1.40-A16/CS1
  Bottom 0.254: v58.93,83.57 58.93,82.8 51.16,75.03 v51.16,74.67 | v60.71,90.42 77.47,90.42 79.5,88.39 80.52,87.38 92.09,87.38 96.74,82.72 96.74,81.31 v96.77,81.28 | v95.25,61.98 95.25,58.67 98.04,55.88 103.38,50.55 U$1.40-A16/CS1
FC-V  (via drill 0.35)
  Top 0.254: R2-FC.2 31.44,90.93 37.08,90.93 40.89,90.93 v41.91,91.95 | v95.76,80.26 95.76,70.17 94.49,68.9 94.49,63.25 v94.44,63.25
  Top 0.406: R1-FC.1 R2-FC.2
  Top 1.27: J1.32 J1.31 U$1.24-A10/TX6/SCL2
  Bottom 0.254: v41.91,91.95 45.72,88.14 75.95,88.14 78.99,88.14 79.5,87.63 82.3,84.84 86.61,84.84 90.68,84.84 91.69,83.82 91.93,83.58 93.09,83.58 93.95,82.72 93.95,82.07 v95.76,80.26 | v94.44,63.25 94.44,59.13 92.2,56.9 91.44,56.13 91.44,54.86 U$1.24-A10/TX6/SCL2
GND  (via drill 0.35)
  Top 0.203: REG-BT.3 45.35,19.81 45.3,19.81 44.79,20.32 REG-BT.10
  Top 0.254: C3-FC.2 41.01,84.44 41.91,85.34 42.42,85.86 REG-FC.10 43.43,85.86 43.69,85.6 43.82,85.46 REG-FC.12
  Top 1.27: U$1.GND1 J1.01 J1.02 | J2.29 J2.30 U$1.GND3 | U$1.GND6 J2.04 J2.03
  other vias: 46.48,85.34 46.48,84.07 47.5,84.58 49.53,83.82 51.31,83.82 49.53,81.79 51.31,81.79 49.53,79.76 51.31,79.76 49.53,77.72 51.31,77.72 49.28,74.17 47.75,20.07 47.75,18.8 48.77,19.56 50.55,18.03 50.55,16.26 50.55,14.22 50.55,12.19 37.85,2.29 41.91,14.99 49.53,3.56 100.08,59.69 93.73,56.9 92.71,51.05 91.19,46.99 92.71,41.4 92.46,36.83 97.28,41.66 99.82,41.66 99.57,37.08 102.11,43.69 101.09,47.5 101.85,72.14 100.08,74.42 101.6,84.07 92.2,88.39 53.85,70.61 98.45,67.31 96.53,64.52 99.47,57.16 97.49,55.08 99.21,80.26 70.87,89.41 77.98,84.33 61.72,89.15 55.88,83.82 98.04,85.85 95,83.06 91.19,83.06 91.19,85.6 82.8,86.11 81.53,89.15 95.25,85.34 99.57,83.31 101.09,87.38 95.71,88.29 94.49,90.17 100.33,91.19 92.2,61.72 95.25,57.66 95.25,54.86 99.82,51.82 103.38,49.28 94.74,38.35 99.82,32.26 83.57,41.66 83.31,48.77 81.79,64.26 81.79,61.47 81.79,58.67 81.51,68.73 82.8,74.93 82.3,76.96 39.88,6.86 53.34,23.88 58.17,23.62 65.79,37.08 46.74,33.27 42.42,33.02 52.58,36.83 66.29,41.4 66.29,48.51 66.29,55.63 38.35,80.52 39.12,89.41 44.2,90.93 44.2,92.46 28.7,91.19 25.4,89.66 9.4,78.74 13.97,78.74 9.14,72.9 13.72,72.9 11.68,78.74 11.43,72.9 10.16,14.22 11.18,8.89 13.72,9.14 20.57,10.41 14.99,10.67 117.09,15.49 121.16,15.49 121.92,12.45 119.13,10.67 116.33,12.45 43.69,26.16 41.15,29.46 45.58,68.32 45.64,16.17 41.66,18.8 54.86,29.31 8.94,10.41 12.95,14.43 59.27,81.7 45.57,13.02 48.01,8.64 83.78,31.71 55.67,81.75 57.91,90.42 96.52,5.08 95,6.6 95,11.43 93.73,14.48 82.8,7.09 45.87,7.01 44.42,4.8 54.61,33.51 50.04,33.51 115.32,23.88 116.59,20.07 122.94,18.03 123.95,21.59 128.78,21.08 126.75,6.6 125.48,5.08 124.46,3.3 122.94,2.03 129.03,22.86 129.29,25.15 129.29,26.92 85.42,1.39 92.46,1.45 97.74,1.42 102.79,1.4 108,1.42 113.33,1.45 118.87,1.4 81.2,1.63 74.68,3.56 68.83,5.84 68.83,10.41 102.32,38.91 103.42,41.87 97.37,31.67 95.4,29.63 97.69,72.97 80.26,79.14 48.12,69.45 41.03,79.5 49.29,68.42 42.28,67.02 38.75,72.65 45.86,75.19 41.3,88.57 83.14,46.38 55.12,59.18 58.42,56.9 55.12,55.88 51.31,55.63 53.59,57.66 81.28,39.62 82.04,38.1 80.26,37.08 71.37,72.64 79.71,74.97 72.14,69.34 75.69,67.06 64.01,68.58 64.01,70.87 64.26,74.42 73.41,70.61 65.53,62.74 68.33,58.17 62.23,58.67 59.44,60.45 60.45,55.37 35.56,52.07 36.32,53.59 37.34,51.56 31.24,52.32 33.02,47.24 37.59,46.23 26.42,52.32 28.19,46.48 29.72,52.58 55.37,10.41 62.99,16 62.23,10.41 68.33,27.18 64.77,25.91 59.44,28.96 61.98,33.02 64.01,35.05 67.56,35.05 60.71,37.34 61.21,42.42 56.9,32.77 57.66,36.83 43.43,35.81 39.12,38.35 37.08,34.04 41.15,42.16 53.09,62.74 57.4,65.28 52.07,65.53 54.86,74.42 65.53,82.04 74.17,76.96 76.96,74.17 79.76,76.96 76.71,79.76 73.15,81.28 22.86,91.95 19.56,25.4 25.4,26.16 24.89,31.75 29.97,32.77 17.02,31.75 20.07,29.21 17.27,26.92 26.67,27.18 35.05,25.4 30.99,25.15 33.27,27.56 35.41,29.59 37.34,28.96 41.66,26.16 38.1,24.13 32,20.07 29.46,20.32 37.85,12.7 37.85,16.76 41.15,13.46 45.21,9.4 35.31,6.6 44.45,3.05 55.63,3.81 65.79,5.33 86.36,6.86 82.3,10.16 86.11,9.91 89.15,8.89 79.2,9.93 76.45,9.91 72.9,9.91 101.35,4.32 98.81,6.86 97.79,8.64 92.71,15.75 88.14,21.34 119.63,24.89 112.78,15.75 113.03,22.61 101.35,40.39 82.55,36.07 82.04,34.29 81.53,29.72 82.3,22.35 101.85,53.85 92.71,70.87 97.28,70.87 82.55,81.28 90.93,79.76 86.36,74.68 86.11,79.76 66.29,79.5 71.88,79.5 71.37,74.42 32.77,92.96 14.73,37.08 13.46,34.04 13.97,28.7 18.29,34.54 23.37,31.75 24.13,34.04 81.03,42.42 82.04,44.2
  pour Top (rank 3, no thermals): 0.35,0.33 130.48,0.33 130.48,97.46 0.09,97.46
  pour Bottom (rank 3, no thermals): 0.33,0.33 130.48,0.33 130.48,97.71 0.33,97.71
MISO  (via drill 0.35)
  Top 0.254: MDAC-BT.7 49.27,6.34 49.53,6.6 v49.53,8.11 | U$1.12-MISO/MQSL 90.42,58.17 91.69,56.9 95.78,52.81 95.78,35.83 v93.98,34.04 | MDAC-FC.7 49.03,72.13 51.56,69.6 v54,69.6 | v82.04,79.5 82.55,78.99 82.55,78.21 83.78,76.98 90.09,76.98 91.14,75.93 v91.14,60.75
  Top 1.27: J1.28 J1.27 U$1.12-MISO/MQSL
  Bottom 0.254: v93.98,34.04 90.17,30.23 83.57,30.23 62.38,9.04 50.47,9.04 v49.53,8.11 | v82.04,79.5 81.03,79.5 79.5,81.03 76.45,81.03 65.02,69.6 v54,69.6 | U$1.12-MISO/MQSL 91.19,59.69 91.19,60.71 v91.14,60.75
MOSI  (via drill 0.35)
  Top 0.254: v96.52,37.85 96.19,38.18 96.19,47.65 96.19,55.45 92.31,59.33 91.12,59.33 89.75,60.71 U$1.11-MOSI/CTX1 | v92.46,65.02 92.46,69.34 94.23,71.12 94.23,80.26 93.47,81.03 91.69,81.03 90.42,82.3 81.33,82.3 v81.03,81.99 | MDAC-FC.5 52.87,73.29 v53.46,73.29 | v52.43,7.98 51.96,7.51 MDAC-BT.5
  Top 1.27: U$1.11-MOSI/CTX1 J1.25 J1.26
  Bottom 0.254: v92.46,65.02 92.46,63.5 U$1.11-MOSI/CTX1 | v81.03,81.99 76.27,81.99 75.64,81.99 70.61,76.96 66.94,73.29 v53.46,73.29 | v52.43,7.98 52.68,7.72 62.89,7.72 84.53,29.36 91.4,29.36 96.52,34.48 v96.52,37.85
MPPT-DISABLE  (via drill 0.35)
  Top 0.254: CHG.MPPTD 62.26,64.48 v65.02,61.72
  Top 1.27: U$1.5-IN2 J1.13 J1.14
  Bottom 0.254: v65.02,61.72 65.53,61.72 79.76,75.95 J1.14
N$1
  Top 0.406: SNS-FC.16 SNS-FC.17
N$2
  Top 0.254: CC-FC.1 46.49,82.58 44.91,80.99 RC-FC.2
N$3
  Top 0.254: REG-FC.11 42.68,85.36 41.66,84.33 41.66,83.31 41.03,82.69 C3-FC.1
N$4
  Top 0.254: REG-FC.8 41.72,86.86 C5-FC.2
N$5
  Top 0.406: SNS-FC.4 SNS-FC.5
N$6
  Top 0.254: C-DC1.2 71.12,70.87 70.87,71.12 69.34,71.12 68.58,71.88 D-FC-EN.3
N$7
  Top 0.254: OP-FC.3 43.31,68.2 44.2,67.31 45.21,67.31 47.24,67.31 48.01,68.07 49.28,69.34 49.28,70.1 49.28,70.61 48.77,71.12 48.76,71.13 MDAC-FC.9
N$8
  Top 0.254: 39.37,77.22 ROP2-FC.1 39.57,76.17 ROP1-FC.1 39.88,74.45 39.88,73.66 39.88,72.39 40.64,71.63 42.04,70.23 OP-FC.2 42.04,68.2
N$9
  Top 0.254: REG-BT.11 43.83,19.82 40.69,16.69 39.88,16.69 C3-BT.1
N$10
  Top 0.254: REG-BT.8 43.7,21.32 43.43,21.59 40.88,24.14 C5-BT.2
N$11
  Top 0.254: CC-BT.1 46.68,15.68 RC-BT.2
N$12
  Top 0.406: SNS-BT.16 SNS-BT.17
N$13
  Top 0.406: SNS-BT.5 SNS-BT.4
N$14
  Top 0.254: C-DC3.2 66.07,22.61 D-BT-EN.3
N$15
  Top 0.254: MDAC-BT.9 47.66,5.29 48.48,5.29 48.64,5.12 48.64,4.56 48.23,4.14 40.81,4.14 38.73,6.22 OP-BT.3
N$16
  Top 0.254: OP-BT.2 38.99,7.49 40.13,8.64 40.13,9.77 40.33,9.96 | 40.33,9.96 ROP2-BT.1 | 40.33,9.96 39.86,10.44 ROP1-BT.1
N$17
  Top 0.254: D-FC-EN.9 69.08,74.42 D-FC-EN.13
N$18
  Top 0.254: C-DC2.2 70.27,75.46 D-FC-EN.7
N$19
  Top 0.254: D-BT-EN.9 63.5,23.11 D-BT-EN.13
N$20
  Top 0.254: C-DC4.2 61.21,24.11 D-BT-EN.7
N$21
  Top 0.406: U$1.7-RX2/OUT1A 88.59,69.8 ROS.2
N$22
  Top 0.254: D-MT-EN.3 95.25,18.8 95.5,19.05 96.27,19.81 96.27,20.57 96.52,20.83 C-DC5.2
N$23
  Top 0.254: D-BC-RG.3 79.75,4.31 79.25,3.81 79.25,2.56 C-DC7.2
N$24
  Top 0.254: D-MT-EN.9 92.97,19.3 D-MT-EN.13
N$25
  Top 0.254: C-DC6.2 90.42,20.3 D-MT-EN.7
N$26
  Top 0.254: D-BC-RG.9 82.8,3.81 D-BC-RG.13
N$27
  Top 0.254: D-BC-RG.7 84.05,2.79 C-DC8.2
N$28
  Top 0.254: D-BC-FC.3 92.21,6.35 92.86,5.69 93.6,5.69 C-DC9.2
N$29
  Top 0.254: D-BC-FC.9 92.71,8.63 D-BC-FC.13
N$30
  Top 0.254: C-DC10.2 94.14,9.42 D-BC-FC.7
N$31
  Top 0.254: D-BT-SQ.3 32.01,49.79 32.92,50.7 32.92,51.69 C-DC11.2
N$32
  Top 0.254: D-BT-SQ.9 29.47,50.29 D-BT-SQ.13
N$33
  Top 0.254: C-DC12.2 28.43,51.47 D-BT-SQ.7
N$34
  Top 0.61: J-NTC.1 J-NTC.A1 15.42,59.4 CHG.THERM
N$35
  Top 0.406: CBLD.1 22.86,28.44 BAL.4
N$36
  Top 0.254: U-SNT.1 116.96,21.84 R-G.2
N$38
  Top 0.406: BAL.7 27.74,29.79 CBL3.1 27.94,30.73 RB1B.2
N$39
  Top 1.524: Q-SNT.2 Q-SNT.4 125.53,24.64 R-SHUNT.1
  pour Top (no thermals): 125.79,21.13 125.81,21.1 125.81,18.57 126.02,18.36 126.97,18.36 127.18,18.57 127.18,20.84 127.19,20.87 128.19,21.88 128.19,26.34 121.7,26.34 120.73,25.37 120.73,24.16 121.7,23.19 123.71,23.19 123.74,23.18
PIN0
  Top 1.27: J1.04 J1.03 U$1.0-RX1/CS1/CRX2
PIN1
  Top 1.27: U$1.1-TX1/MISO1/CTX2 J1.05 J1.06
PIN10
  Top 1.27: J1.24 J1.23 U$1.10-CS\MQSR
PIN14
  Top 1.27: J2.25 J2.26 U$1.14-A0/TX3/SPDIF_OUT
PIN15
  Top 1.27: U$1.15-A1/RX3/SPDIF_IN J2.24 J2.23
PIN16
  Top 1.27: J2.21 J2.22 U$1.16-A2/RX4/SCL1
PIN17
  Top 1.27: U$1.17-A3/TX4/SDA1 J2.20 J2.19
PIN20
  Top 1.27: J2.13 J2.14 U$1.20-A6/TX5/LRCLK1
PIN21
  Top 1.27: U$1.21-A7/RX5/BCLK1 J2.12 J2.11
PIN22
  Top 1.27: J2.09 J2.10 U$1.22-A8/CTX1
PIN23
  Top 1.27: U$1.23-A9/CRX1/MCLK1 J2.08 J2.07
PIN33
  Top 1.27: U$1.33-MCLK2 J2.48 J2.47
PIN34
  Top 1.27: J2.45 J2.46 U$1.34-RX8
PIN35
  Top 1.27: U$1.35-TX8 J2.44 J2.43
RGN-V
  Top 0.254: R1-SNT.1 R2-SNT.2 112.72,19 112.78,19.05 114.11,20.39 114.11,22.29 U-SNT.2 114.37,45.91 114.05,46.23 112.27,48.01 J2.35
  Top 1.27: U$1.39-A15/CS/OUT1A J2.36 J2.35
S$3  (via drill 0.35 pad 0.25)
  other vias: 1.52,38.61
SCK  (via drill 0.35)
  Top 0.254: MDAC-BT.4 53.33,6.34 54.06,7.07 v54.1,7.07 | 103.38,58.17 100.84,55.63 98.55,53.34 98.55,39.88 v97.23,38.56 | 103.38,58.17 U$1.13-SCK/LED | MDAC-FC.4 53.84,72.13 v53.85,72.14 | v81.53,80.77 81.79,80.77 83.16,79.4 83.16,78.36 84.14,77.39 90.26,77.39 91.59,76.05 91.59,64.19 97.62,58.17 103.38,58.17
  Top 1.27: U$1.13-SCK/LED J2.28 J2.27
  Bottom 0.254: v81.53,80.77 80.77,80.77 80.01,81.53 76.13,81.53 66.73,72.14 v53.85,72.14 | v97.23,38.56 97.23,34.24 91.95,28.96 85.09,28.96 63.25,7.11 54.15,7.11 v54.1,7.07
SCL  (via drill 0.35)
  Top 0.254: 110.03,73.35 J2.15 110.29,73.1 RSCL.1 | CHG.SCL 47.72,54.32 49.53,56.13 55.37,61.98 61.38,61.98 64.55,58.81 v64.65,58.81
  Top 1.27: U$1.19-A5/SCL0 J2.16 J2.15
  Bottom 0.254: U$1.19-A5/SCL0 104.65,73.66 101.85,73.66 100.51,72.31 78.5,72.31 64.99,58.81 v64.65,58.81
SDA  (via drill 0.35)
  Top 0.254: 110.03,70.92 J2.17 110.29,71.17 RSDA.1 | CHG.SDA 48.99,56.86 54.76,62.64 61.75,62.64 65.7,58.69 v65.7,58.59
  Top 1.27: J2.17 J2.18 U$1.18-A4/SDA0
  Bottom 0.254: U$1.18-A4/SDA0 101.78,70.87 100.74,71.91 79.27,71.91 66.04,58.67 65.79,58.67 v65.7,58.59
V-MOT
  Top 0.254: R1-SNT.2 113.79,17.78 114.05,17.78 118.62,17.78 118.92,18.09 R-GS.2
  Top 0.406: 128.79,17.02 125.98,17.02 122.25,17.02 Z-SNT.1 119.1,18.62 R-GS.2
  Top 1.524: C-D7.1 87.17,5.54 88.14,4.57 88.14,4.32 89.66,2.79 105.92,2.79 108.97,5.84 J-M.1 122.68,5.84 125.98,9.14 128.79,11.95 128.79,17.02 Q-SNT.3
  pour Top (no thermals): 109.68,9.33 101.47,17.55 96.4,17.55 96.38,17.56 95.57,18.36 94.31,18.36 94.31,13.37 105.57,2.11 121.13,2.11 123.62,4.6 123.62,6.32 120.62,9.32 109.71,9.32
  pour Top (no thermals): 83.64,4.27 86.96,4.27 87.05,4.35 87.05,5.66 86.48,6.22 84.31,6.22 83.64,5.56
VBAL+
  Top 0.406: J-BL.1 11.43,42.16 13.97,39.62 17.27,36.32 17.27,32.77 18.29,31.75 RB2.2 18.54,32.01 19.05,32.51 19.3,32.77 24.64,32.77 26.92,32.77 RB1B.1
VBT  (via drill 0.35 pad 0.25)
  Top 0.254: REG-BT.7 44.56,22 REG-BT.15 | C2-BT.1 42.94,23.36 41.66,24.64 40.89,25.4 37.13,25.4 33.01,21.28 29.72,21.28 27.99,21.28 27.69,21.59 27.63,21.64 R1-BT.2 | J-BT.1 13.21,18.03 17.53,18.03 20.83,14.73 20.83,12.95 24.13,12.95 24.13,23.62 8.13,23.62
  Top 0.508: CIN-5V.1 61.61,40.39 59.18,40.39 REG-5V.3
  Top 1.016: v46.99,34.54 45.92,34.54 41.91,34.54 40.39,33.02 39.12,31.75 34.8,31.75 | REG-5V.3 59.18,36.07 v57.66,34.54
  Top 1.524: 34.8,31.75 34.8,48.66 C-D12.1
  Top 2.54: L-BT.P$1 23.15,20.1 28.19,25.15 34.8,31.75
  Bottom 1.016: v57.66,34.54 v46.99,34.54
  pour Top (no thermals): 14.02,15.24 14.11,15.2 16.62,12.7 25.55,12.7 28.19,15.35 28.19,23.62 8.74,23.62 7.87,22.75 7.87,17.12 9.76,15.24
  pour Top (no thermals): 43.94,21.84 44.58,21.84 44.58,23.62 43.94,23.62
  pour Top (no thermals): 9.25,17.53 13.46,17.53 13.46,23.62 7.87,23.62 7.87,18.9
  pour Top (no thermals): 32.67,49.76 32.28,49.36 32.25,49.35 30.81,49.35 30.81,48.55 31.02,48.34 34.98,48.34 34.98,49.75 34.97,49.76
VBUS
  Top 0.254: C-D2.1 67.7,67.42 68.58,66.55 78.69,56.44 78.69,46.99 R1-BUS.2 73.41,41.45 73.41,26.67 73.41,21.84 71.88,20.32 68.21,20.32 C-D4.1 | C-D5.1 88.5,16.76 78.49,16.76 71.77,16.76 C-D4.1 | C-D4.1 66.35,20.46 D-BT-EN.1_2 | D-BC-FC.11_12 90.83,10.2 C-D9.1
  pour Top (no thermals): 82.51,17.97 79.47,21.01 67.29,21.01 67.27,21.02 66.11,22.17 64.85,22.17 64.85,17.56 71.66,10.74 91.66,10.74 92.13,11.21 92.13,18.85 90.84,18.85 89.96,17.97 89.93,17.96 82.53,17.96
  pour Top (no thermals): 91.07,9.47 92.3,9.47 92.3,12.24 91.64,12.9 89.76,12.9 89.76,10.78
  pour Top (no thermals): 69.56,60.39 69.6,60.26 69.6,21.29 71.33,19.56 78.78,19.56 79.55,20.32 78.99,20.87 78.93,20.99 78.89,21.12 78.89,61.36 72.43,67.82 69.28,67.82 69.15,67.85 69.03,67.92 67.92,69.03 67.85,69.15 67.82,69.28 67.82,72.64 65.87,72.64 65.53,72.31 65.53,64.47 69.49,60.51
VBUS-BT
  Top 0.254: SNS-BT.2 53.66,19.94 53.66,19.88 54.86,18.68 54.86,18.03 62.23,18.03
  pour Top (no thermals): 54.09,19.48 54.06,19.49 53.71,19.85 53.7,19.87 53.7,21.38 53.56,21.51 52.1,21.51 51.84,21.25 51.84,18.88 54.64,16.08 61.28,16.08 62.64,17.43 62.64,22.68 61.88,22.68 60.47,21.27 60.44,21.26 59,21.26 59,20.05 58.99,20.02 58.46,19.49 58.44,19.48
VBUS-FC
  Top 0.406: C-D1.1 65.79,77.98 65.28,78.49
  pour Top (no thermals): 56.17,78.29 56.05,78.36 55.58,78.83 55.51,78.95 55.47,79.08 55.47,80.26 54.61,80.26 54.61,77.17 56.09,75.69 68.25,75.69 68.25,78.26 56.3,78.26
VC1
  Top 0.406: BAL.2 21.51,29.79 CBL1.1 19.33,30.21 CBL2.1 19.32,28.46 RB3.2
VC1_CB
  Top 0.406: RB1A.2 21.52,29.14 BAL.3
VC2
  Top 0.406: BAL.1 21.59,31.76 CBL1.2 19.57,31.76 RB2.1
VCHG
  pour Top (no thermals): 24.42,49.96 22.14,47.69 22.11,47.68 20.14,47.68 20.17,43.31 23.39,43.31 28.65,48.57 28.65,49.96
VCHG-IN  (via drill 0.35)
  Top 0.254: R1-CHG.2 77.58,5.84 C-D8.1
  Top 0.813: C-D10.1 90.68,4.57 90.17,5.08 | C-D8.1 77.72,8.38
  Top 1.524: 90.17,5.08 86.87,8.38 77.72,8.38 74.42,8.38 66.29,8.38 64.26,6.35 63.5,5.59 v58.67,5.59 | v39.62,34.54 39.62,34.8 40.64,35.81 43.18,38.35 43.18,49.53 43.18,61.21 43.69,61.72 43.91,61.94 CHG.VIN+ 46.28,62.23
  Bottom 1.524: v58.67,5.59 45.47,5.59 43.69,7.37 39.62,11.43 v39.62,34.54
  pour Top (no thermals): 87.71,3.89 91.62,3.89 91.62,5.58 91.63,5.61 91.77,5.75 91.77,7.29 88.02,7.29 87.71,6.98
  pour Top (no thermals): 76.91,5.26 76.99,5.18 78.48,5.18 78.5,5.17 78.92,4.75 81.43,4.75 81.43,6.98 80.54,7.87 76.99,7.87 76.91,7.79
VCOMP-BT
  Top 0.254: REG-BT.2 45.09,18.41 45.72,17.78 46.23,17.27 CC-BT.2
VCOMP-FC
  Top 0.254: REG-FC.2 43.82,83.93 CC-FC.2
VDROOP-BT
  Top 0.254: MDAC-BT.10 46.21,4.84 44.83,6.22 OP-BT.6 | OP-BT.6 41.78,6.22 | OP-BT.6 41.27,6.22 40.64,6.86 40.64,9.14 41.15,9.65 41.91,9.65 42.73,10.47 ROP2-BT.2 42.84,10.62 RINJ-BT.1
VDROOP-FC
  Top 0.254: RINJ-FC.1 42.52,78.54 ROP2-FC.2 41.2,76.82 42.21,75.81 42.72,75.81 43.31,75.22 43.31,74.3 OP-FC.6 43.31,73.03 43.94,72.39 45.7,70.63 MDAC-FC.10
VFB-BT
  Top 0.254: REG-BT.14 44.4,19.34 REG-BT.1 44.28,19.34 43.41,18.47 43.41,17.56 | RD1-BT.1 RD2-BT.2 | RD2-BT.2 46.43,11.18 | RD1-BT.1 44.96,14.93 44.96,16.26 44.96,16.51 44.45,17.02 43.9,17.56 43.41,17.56 | 43.41,17.56 C6-BT.2 | RD1-BT.1 45.72,12.24 | RINJ-BT.2 45.72,12.24 | 45.72,12.24 46.68,11.28 RD2-BT.2
VFB-FC
  Top 0.254: RD1-FC.1 44.8,78.84 43.94,79.7 43.94,80.26 43.94,81.95 C6-FC.2 43.32,83.26 REG-FC.14 43.29,84.68 REG-FC.1 | RD1-FC.1 RD2-FC.2 43.23,76.71 RINJ-FC.2 43.07,76.91 RD1-FC.1
VFC
  Top 0.305: J-FC.1 16.62,83.82 C1-FC.1 | C1-FC.1 21.98,83.31 L-FC.P$1 31.03,90.42 38.35,90.42 41.78,90.42 41.78,89.31 42.44,88.65 | J-FC.1 11.43,81.79 10.67,81.03 | J-FC.1 11.43,84.33 13.46,86.36 25.4,86.36 25.91,86.87 | C1-FC.1 18.66,81.79 16.51,81.79 | J-FC.1 19.81,83.82 20.32,84.33
  Top 0.406: L-FC.P$1 23.91,90.77 R1-FC.2
  pour Top (no thermals): 10.95,80.34 24.86,80.34 27.36,82.84 27.36,86.07 25.62,87.81 11.21,87.81 9.22,85.82 9.22,82.07
  pour Top (no thermals): 42.49,87.2 43.36,87.2 43.36,89.08 42.49,89.08
VG
  Top 0.406: Q-SNT.1 124.19,19.83 123.7,20.32 122,22.02 Z-SNT.2 119.05,22.02 R-G.1 118.87,21.08 118.11,20.32 117.3,19.5 R-GS.1
VMID
  Top 0.406: J-BL.2 14.73,34.8 14.73,32.51 14.73,30.23 16.26,28.7 16.51,28.45 RB3.1 18.29,27.94 18.8,27.43 RB1A.1
VOUT-BT  (via drill 0.35)
  Top 0.254: 48.51,13.21 RD1-BT.2 48.51,13.21 | REG-BT.13 48.12,21.22 v48.26,21.08 | v49.28,13.97 48.51,13.21
  Top 0.305: C4B-BT.1 50.04,27.48 50.04,25.91
  Bottom 0.254: v48.26,21.08 49.53,19.81 49.53,14.22 v49.28,13.97
  pour Top (no thermals): 45.68,25.54 45.72,25.45 45.72,21.34 47.14,21.34 48.01,22.2 48.01,23.42 48.04,23.51 50.4,25.87 50.5,25.91 53.59,25.91 53.59,29.72 43.18,29.72 43.18,28.05
VOUT-FC  (via drill 0.35)
  Top 0.254: RD1-FC.2 47.5,78.74 47.75,78.74 v48.01,78.99 | REG-FC.13 47.36,86.75 v47.5,86.61
  Bottom 0.254: v47.5,86.61 48.26,85.85 48.26,82.55 48.26,79.25 v48.01,78.99
  pour Top (no thermals): 44.27,87.85 44.27,86.69 47.01,86.69 47.03,86.68 49.05,84.66 55.59,84.66 55.93,84.99 55.93,90.01 55.59,90.35 45.68,90.35 45.03,89.71 45.03,88.63 45.02,88.6
VSW-BT
  Top 0.406: 40.89,20.82 REG-BT.9 44.31,20.8 44.96,20.8 45.19,20.57 REG-BT.4 | 40.89,20.82 40.39,20.32 38.1,20.32 34.25,16.47 L-BT.P$2 | C5-BT.1 40.89,21.84 40.89,20.82
  pour Top (no thermals): 44.63,20.65 44.63,21.01 43.67,21.01 43.64,21.02 41.62,23.04 36.48,23.04 32.84,19.4 32.84,16.33 35.53,16.33 38.82,19.62 38.85,19.63 42.64,19.63 43.64,20.64 43.67,20.65
VSW-FC
  Top 0.254: L-FC.P$2 39,87.3 C5-FC.1
  Top 0.406: REG-FC.9 43.04,86.34 43.63,86.34 43.86,86.11 REG-FC.4
  pour Top (no thermals): 43.36,86.18 43.36,86.54 41.39,86.54 41.36,86.55 40.35,87.55 37.62,87.55 35.64,85.57 35.64,81.61 38.58,81.61 42.23,85.27 41.13,85.27 41.1,85.28 41.08,85.3 41.07,85.33 41.07,85.36 41.08,85.39 41.87,86.17 41.89,86.18

## Text on the board
tPlace: FUEL CELL POWER | VFC | GND | CELL BALANCE | V+ | MID | V- | DC BALANCER & INTEGRATION BOARD / REV 1.0, 2026-06-04 / PEMFC SCALE CAR PROJECT / FUTURE MOBILITY LAB, UC DAVIS / RICKY TAN | 3V3 | 3V3 | GND | GND | VBAT | GND | GND | BATTERY POWER | VBUS
tNames: CAL